# Altium PCB LightLinkV2.PcbDoc (part 1 of 2)
Units mil, origin at the board's own origin, x right, y up, seen from the top; angles counter-clockwise.
Board outline 15795 x 10265 mil, 4 copper layers (Top Layer, VCC, GND, Bottom Layer), stack 23.756 mil thick; 269 components, 206 nets, 809 pads, 14 vias.
Unrouted connection lines stored in the file: 511.
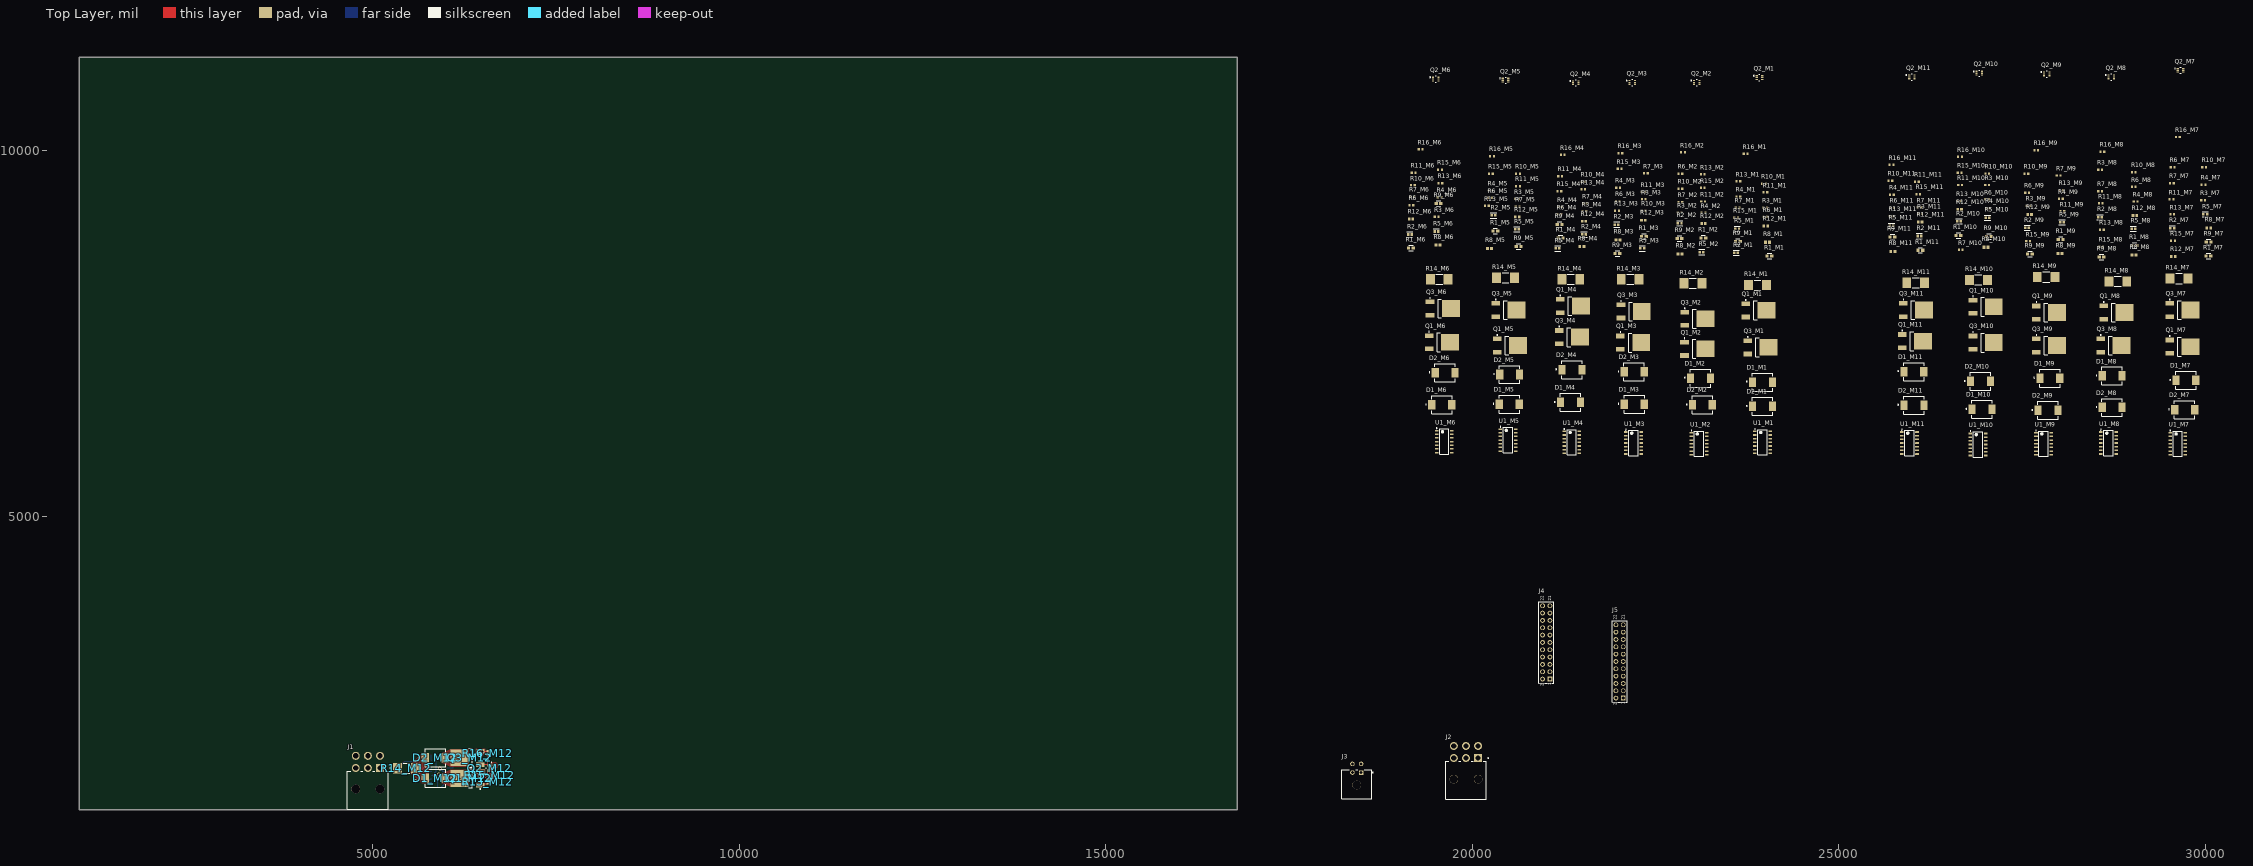
[diagram p0: Top Layer view]
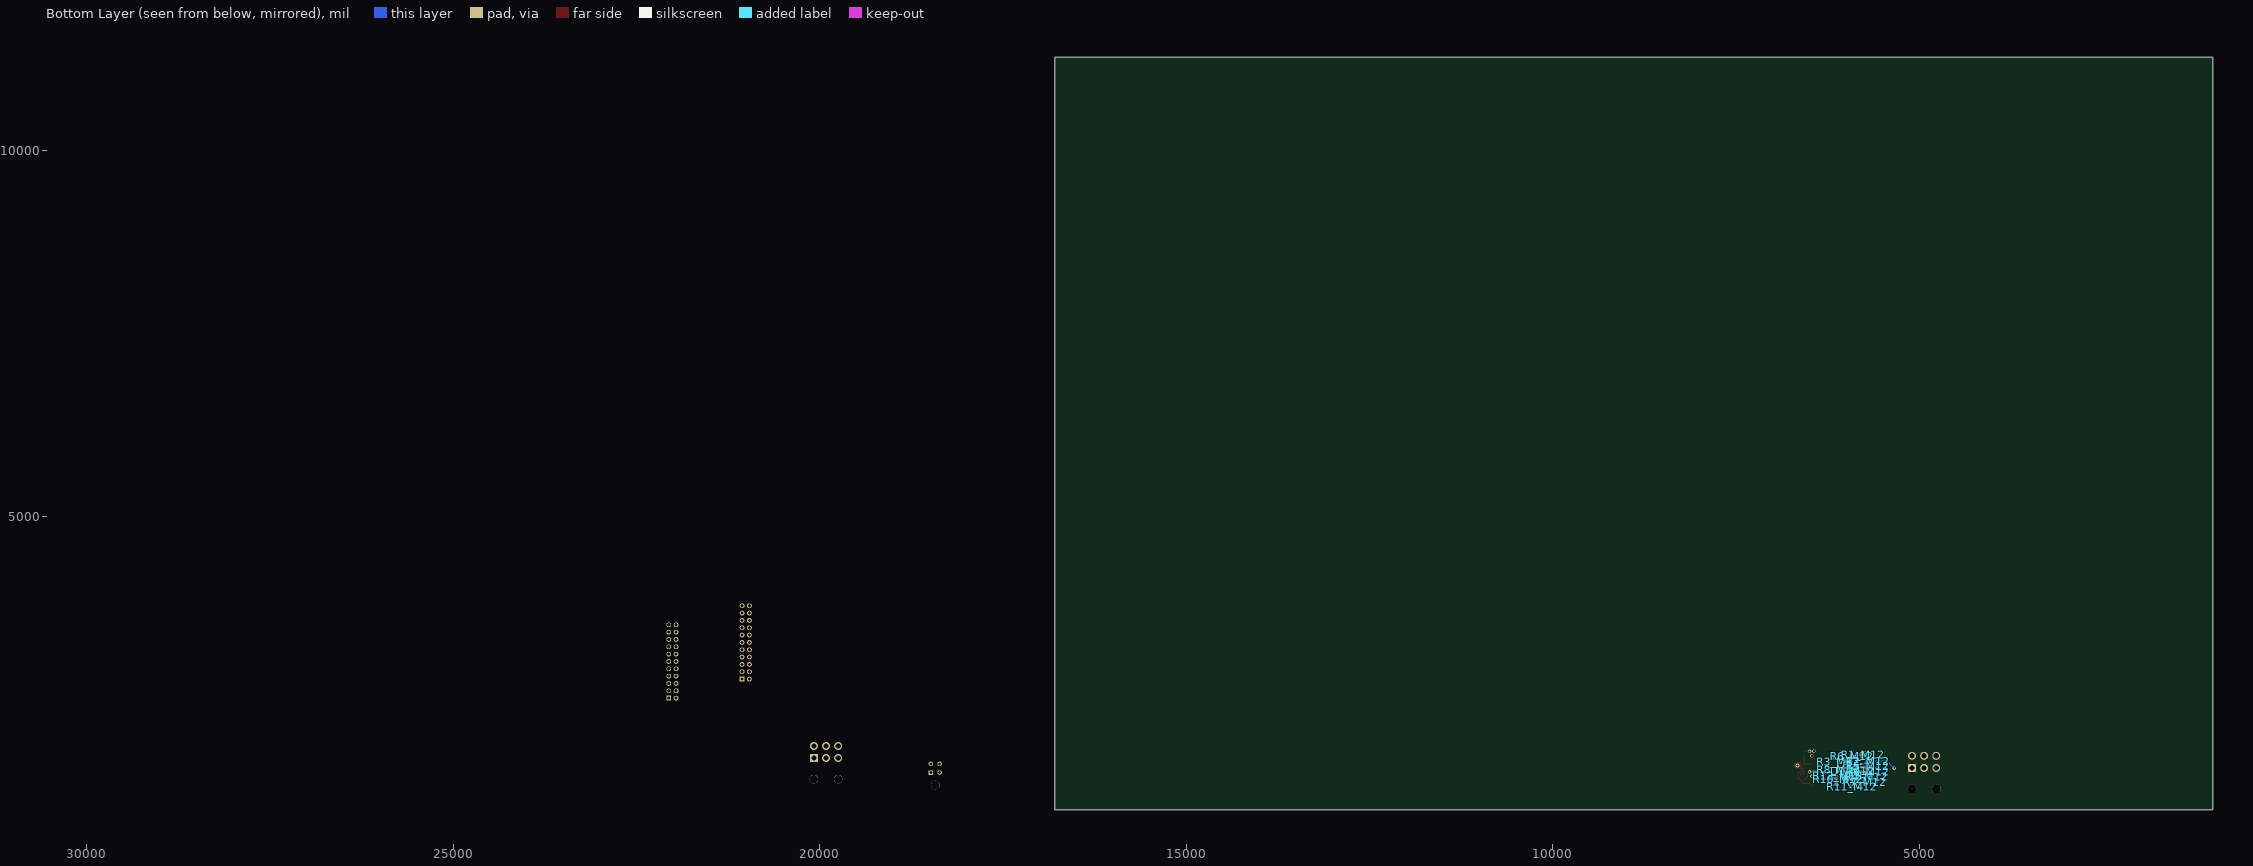
[diagram p1: Bottom Layer view, seen from below]
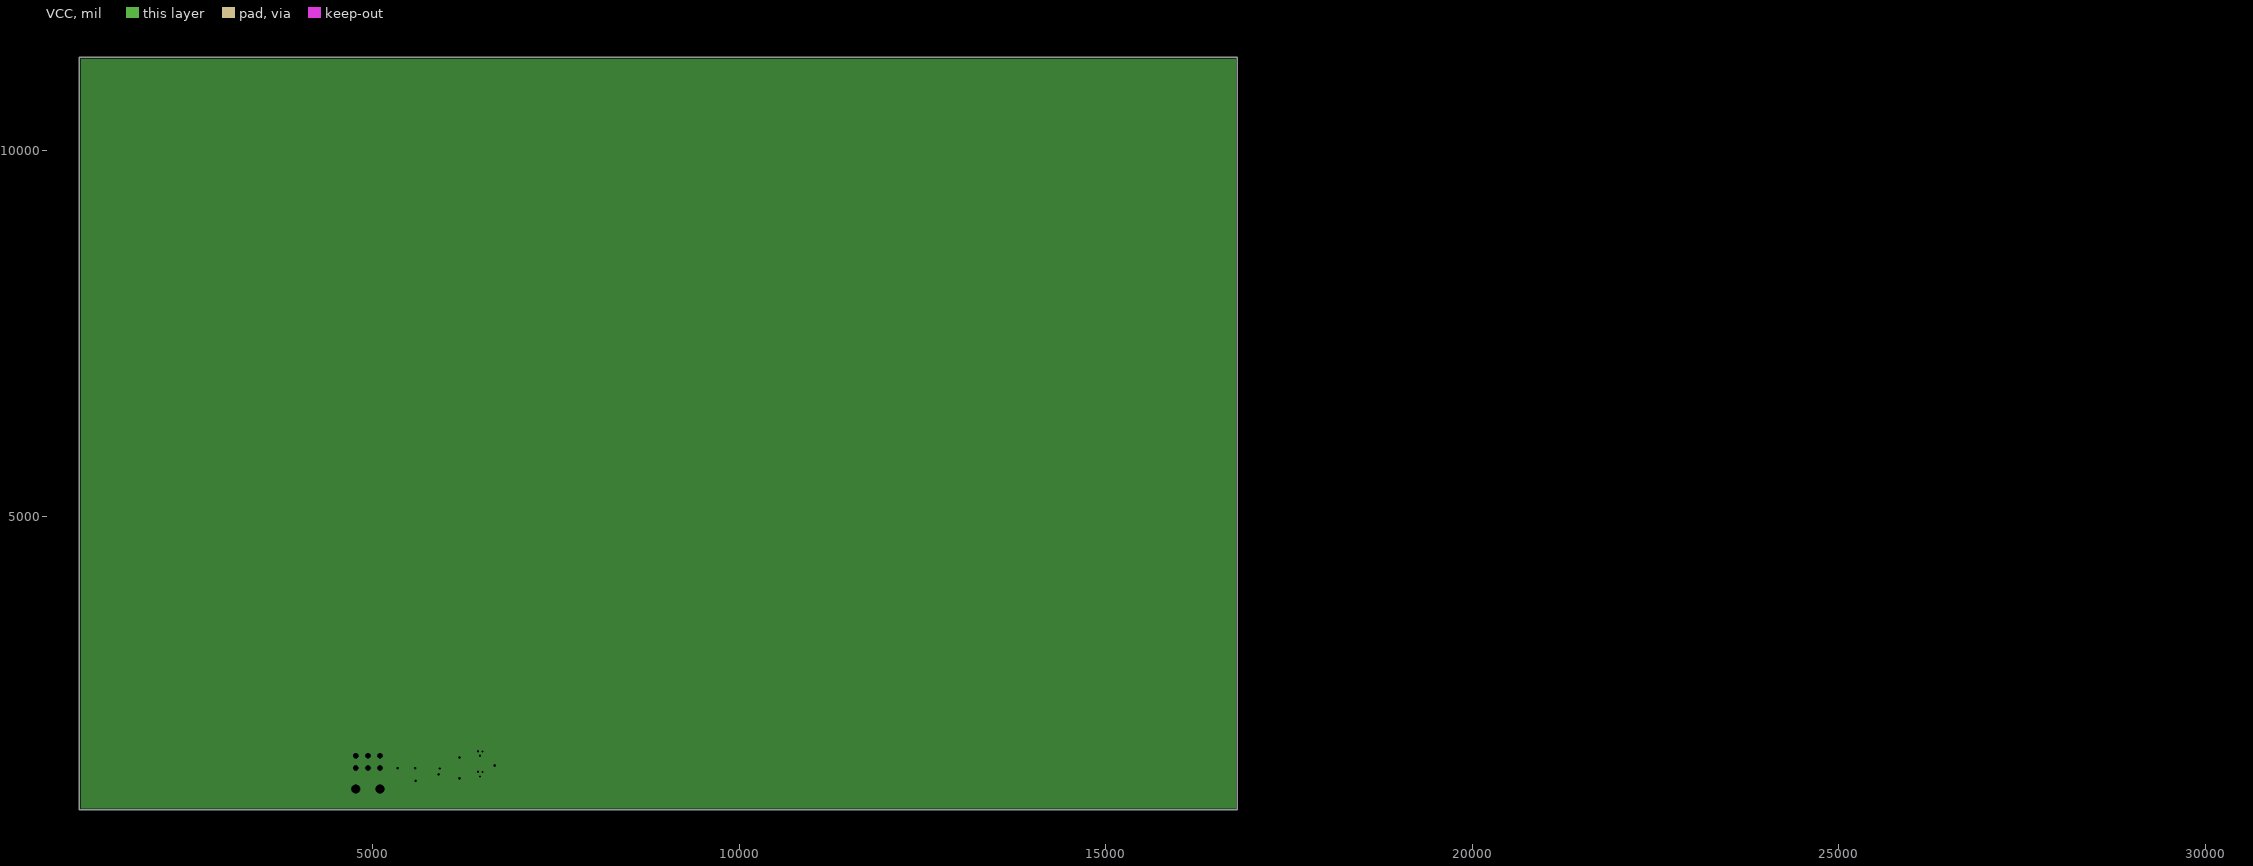
[diagram p2: VCC, clearances drawn from the general rule]
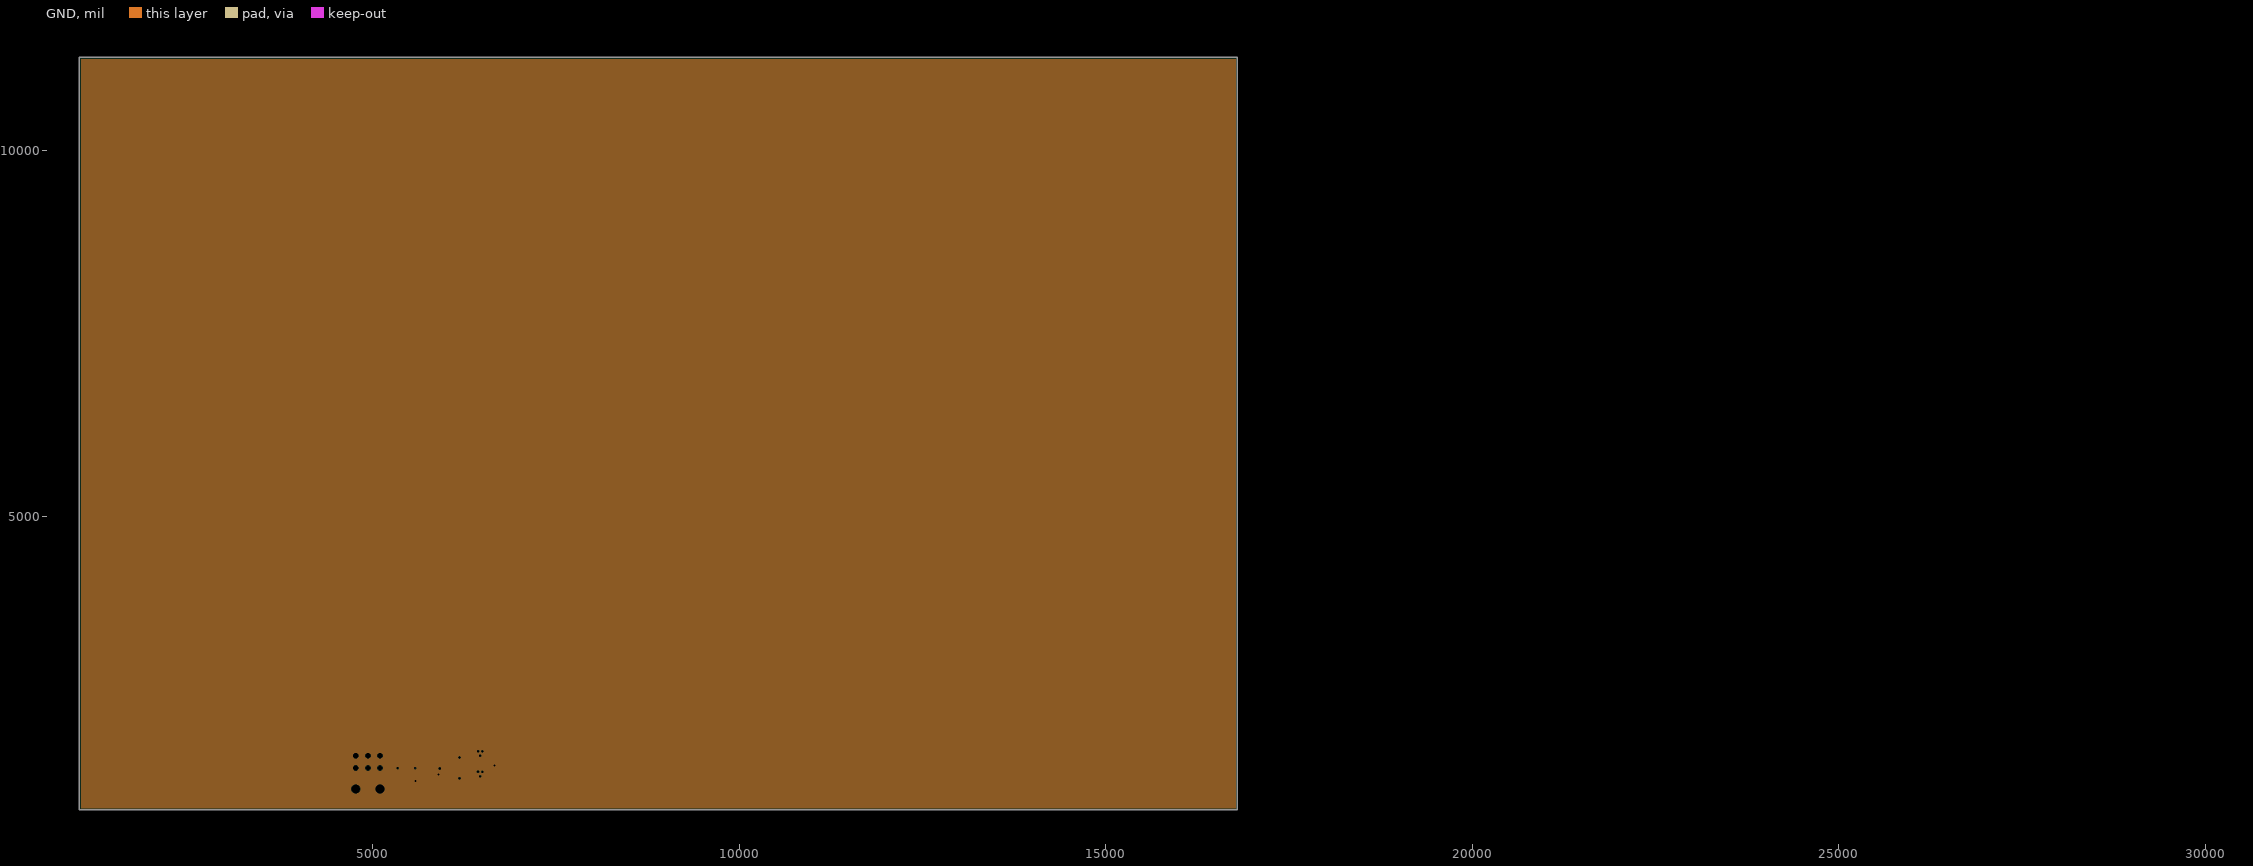
[diagram p3: GND, clearances drawn from the general rule]

## Layer stack, top to bottom
Top Solder: solder mask 0.4, Solder Resist, Dk 3.5
Top Layer: signal copper 1.4
Dielectric 2: prepreg 2.8, PP-006, Dk 4.1
VCC: plane copper 1.378, net VCC
Dielectric 1: dielectric 12.6, FR-4, Dk 4.8
GND: plane copper 1.378, net GND
Dielectric 3: prepreg 2.8, PP-006, Dk 4.1
Bottom Layer: signal copper 1.4
Bottom Solder: solder mask 0.4, Solder Resist, Dk 3.5

## Board outline
1000,1000 16795,1000 16795,11265 1000,11265

## Design rules (kind name [scope] priority, off if disabled: settings)
BoardOutlineClearance [All] p1: gap=7.87 ignorepadtopadclearanceinfootprint=FALSE
Clearance [All] p1: gap=4 ignorepadtopadclearanceinfootprint=FALSE except(5: Arc-Via Track-Via SMDPad-Via THPad-Via Via-Via Via-Fill Via-Poly Via-Region Via-Text; 9.84: Arc-Hole Track-Hole SMDPad-Hole THPad-Hole Via-Hole Fill-Hole Poly-Hole Region-Hole Text-Hole)
ComponentClearance [All] p1: gap=4 collisioncheckmode=3 verticalgap=4 showdistances=TRUE
DiffPairsRouting [All] p1: maxlimit=4 minlimit=4 mostfreqgap=4 toplayer_minwidth=4 toplayer_maxwidth=71497.94 toplayer_prefwidth=4 bottomlayer_minwidth=4 bottomlayer_maxwidth=71497.94 bottomlayer_prefwidth=4 maxuncoupledlength=500
Height [All] p1: minheight=0 maxheight=71497.94 prefheight=500
HoleSize [All] p1: absolutevalues=TRUE maxlimit=248.03 minlimit=7.87 maxpercent=80.000 minpercent=20.000
HoleToHoleClearance [All] p1: gap=9.84 allowstackedmicrovias=FALSE
MinimumAnnularRing [All] p1: minimumring=3
MinimumSolderMaskSliver [All] p1: minsoldermaskwidth=0
PlaneClearance [All] p1: clearance=4
PlaneConnect PlaneConnectPowerPads [InPadClass('PowerPads')] p1: planeconnectstyle=Direct reliefexpansion=20 reliefentries=4 reliefconductorwidth=10 reliefairgap=10
PlaneConnect [All] p2: pad.planeconnectstyle=Relief pad.reliefexpansion=11.81 pad.reliefentries=4 pad.reliefconductorwidth=4 pad.reliefairgap=4 via.planeconnectstyle=Direct via.reliefexpansion=11.81 via.reliefentries=4 via.reliefconductorwidth=5 via.reliefairgap=5
PolygonConnect PolygonConnectPowerPads [All vs (InPadClass('PowerPads'))] p1: connectstyle=Direct reliefconductorwidth=10 reliefentries=4 polygonreliefangle="90 Angle" airgapwidth=10
PolygonConnect [All] p2: thpad.connectstyle=Relief thpad.reliefconductorwidth=4 thpad.reliefentries=4 thpad.polygonreliefangle="90 Angle" thpad.airgapwidth=4 smdpad.connectstyle=Direct smdpad.reliefconductorwidth=4 smdpad.reliefentries=4 smdpad.polygonreliefangle="90 Angle" smdpad.airgapwidth=4 via.connectstyle=Direct via.reliefconductorwidth=5 via.reliefentries=4 via.polygonreliefangle="90 Angle" via.airgapwidth=5
RoutingVias [All] p1: holewidth=7.87 width=17.72 viastyle="Through Hole" minholewidth=7.87 minwidth=17.72 maxholewidth=248.03 maxwidth=257.87
SilkToSilkClearance [All] p1: silktosilkclearance=0
SilkToSolderMaskClearance [IsPad] p1: minsilkscreentomaskgap=4 clearancetoexposedcopper=TRUE
SolderMaskExpansion [All] p1: expansion=2.95 istentingtop=FALSE
Width [All] p1: maxlimit=71497.94 minlimit=4 preferedwidth=4
20 further rules are at their usual default settings.

## Classes and differential pairs
channel class MOSFET: M1 M2 M3 M4 M5 M6 M7 M8 M9 M10 M11 M12
component class M12: D1_M12 D2_M12 Q1_M12 Q2_M12 Q3_M12 R1_M12 R2_M12 R3_M12 R4_M12 R5_M12 R6_M12 R7_M12 R8_M12 R9_M12 R10_M12 R11_M12 R12_M12 R13_M12 R14_M12 R15_M12 R16_M12 U1_M12
component class M11: D1_M11 D2_M11 Q1_M11 Q2_M11 Q3_M11 R1_M11 R2_M11 R3_M11 R4_M11 R5_M11 R6_M11 R7_M11 R8_M11 R9_M11 R10_M11 R11_M11 R12_M11 R13_M11 R14_M11 R15_M11 R16_M11 U1_M11
component class M10: D1_M10 D2_M10 Q1_M10 Q2_M10 Q3_M10 R1_M10 R2_M10 R3_M10 R4_M10 R5_M10 R6_M10 R7_M10 R8_M10 R9_M10 R10_M10 R11_M10 R12_M10 R13_M10 R14_M10 R15_M10 R16_M10 U1_M10
component class M9: D1_M9 D2_M9 Q1_M9 Q2_M9 Q3_M9 R1_M9 R2_M9 R3_M9 R4_M9 R5_M9 R6_M9 R7_M9 R8_M9 R9_M9 R10_M9 R11_M9 R12_M9 R13_M9 R14_M9 R15_M9 R16_M9 U1_M9
component class M8: D1_M8 D2_M8 Q1_M8 Q2_M8 Q3_M8 R1_M8 R2_M8 R3_M8 R4_M8 R5_M8 R6_M8 R7_M8 R8_M8 R9_M8 R10_M8 R11_M8 R12_M8 R13_M8 R14_M8 R15_M8 R16_M8 U1_M8
component class M7: D1_M7 D2_M7 Q1_M7 Q2_M7 Q3_M7 R1_M7 R2_M7 R3_M7 R4_M7 R5_M7 R6_M7 R7_M7 R8_M7 R9_M7 R10_M7 R11_M7 R12_M7 R13_M7 R14_M7 R15_M7 R16_M7 U1_M7
component class M6: D1_M6 D2_M6 Q1_M6 Q2_M6 Q3_M6 R1_M6 R2_M6 R3_M6 R4_M6 R5_M6 R6_M6 R7_M6 R8_M6 R9_M6 R10_M6 R11_M6 R12_M6 R13_M6 R14_M6 R15_M6 R16_M6 U1_M6
component class M5: D1_M5 D2_M5 Q1_M5 Q2_M5 Q3_M5 R1_M5 R2_M5 R3_M5 R4_M5 R5_M5 R6_M5 R7_M5 R8_M5 R9_M5 R10_M5 R11_M5 R12_M5 R13_M5 R14_M5 R15_M5 R16_M5 U1_M5
component class M4: D1_M4 D2_M4 Q1_M4 Q2_M4 Q3_M4 R1_M4 R2_M4 R3_M4 R4_M4 R5_M4 R6_M4 R7_M4 R8_M4 R9_M4 R10_M4 R11_M4 R12_M4 R13_M4 R14_M4 R15_M4 R16_M4 U1_M4
component class M3: D1_M3 D2_M3 Q1_M3 Q2_M3 Q3_M3 R1_M3 R2_M3 R3_M3 R4_M3 R5_M3 R6_M3 R7_M3 R8_M3 R9_M3 R10_M3 R11_M3 R12_M3 R13_M3 R14_M3 R15_M3 R16_M3 U1_M3
component class M2: D1_M2 D2_M2 Q1_M2 Q2_M2 Q3_M2 R1_M2 R2_M2 R3_M2 R4_M2 R5_M2 R6_M2 R7_M2 R8_M2 R9_M2 R10_M2 R11_M2 R12_M2 R13_M2 R14_M2 R15_M2 R16_M2 U1_M2
component class M1: D1_M1 D2_M1 Q1_M1 Q2_M1 Q3_M1 R1_M1 R2_M1 R3_M1 R4_M1 R5_M1 R6_M1 R7_M1 R8_M1 R9_M1 R10_M1 R11_M1 R12_M1 R13_M1 R14_M1 R15_M1 R16_M1 U1_M1
component class LightLinkV2: J1 J2 J3 J4 J5

## Components (designator, comment, footprint, x,y, rotation, side; value= is the part's Value field where it differs from the comment)
D1_M1 "S5BC-13-F" FP-SMC-MFG 23960,6835 r0 top value=40pF (schematic designator D1)
D1_M2 "S5BC-13-F" FP-SMC-MFG 23115,6890 r0 top value=40pF (schematic designator D1)
D1_M3 "S5BC-13-F" FP-SMC-MFG 22210.83,6535 r0 top value=40pF (schematic designator D1)
D1_M4 "S5BC-13-F" FP-SMC-MFG 21340,6560 r0 top value=40pF (schematic designator D1)
D1_M5 "S5BC-13-F" FP-SMC-MFG 20505.83,6535 r0 top value=40pF (schematic designator D1)
D1_M6 "S5BC-13-F" FP-SMC-MFG 19585,6525 r0 top value=40pF (schematic designator D1)
D1_M7 "S5BC-13-F" FP-SMC-MFG 29735.83,6860 r0 top value=40pF (schematic designator D1)
D1_M8 "S5BC-13-F" FP-SMC-MFG 28730,6920 r0 top value=40pF (schematic designator D1)
D1_M9 "S5BC-13-F" FP-SMC-MFG 27880,6890 r0 top value=40pF (schematic designator D1)
D1_M10 "S5BC-13-F" FP-SMC-MFG 26955,6465 r0 top value=40pF (schematic designator D1)
D1_M11 "S5BC-13-F" FP-SMC-MFG 26025,6980 r0 top value=40pF (schematic designator D1)
D1_M12 "S5BC-13-F" FP-SMC-MFG 5854.17,1430 r0 top value=40pF (schematic designator D1)
D2_M1 "S5BC-13-F" FP-SMC-MFG 23960.83,6505 r0 top value=40pF (schematic designator D2)
D2_M2 "S5BC-13-F" FP-SMC-MFG 23140,6525 r0 top value=40pF (schematic designator D2)
D2_M3 "S5BC-13-F" FP-SMC-MFG 22210,6975 r0 top value=40pF (schematic designator D2)
D2_M4 "S5BC-13-F" FP-SMC-MFG 21360,7005 r0 top value=40pF (schematic designator D2)
D2_M5 "S5BC-13-F" FP-SMC-MFG 20510,6940 r0 top value=40pF (schematic designator D2)
D2_M6 "S5BC-13-F" FP-SMC-MFG 19630.83,6965 r0 top value=40pF (schematic designator D2)
D2_M7 "S5BC-13-F" FP-SMC-MFG 29720,6460 r0 top value=40pF (schematic designator D2)
D2_M8 "S5BC-13-F" FP-SMC-MFG 28730,6490 r0 top value=40pF (schematic designator D2)
D2_M9 "S5BC-13-F" FP-SMC-MFG 27855,6450 r0 top value=40pF (schematic designator D2)
D2_M10 "S5BC-13-F" FP-SMC-MFG 26935,6845 r0 top value=40pF (schematic designator D2)
D2_M11 "S5BC-13-F" FP-SMC-MFG 26025.83,6520 r0 top value=40pF (schematic designator D2)
D2_M12 "S5BC-13-F" FP-SMC-MFG 5854.17,1710 r0 top value=40pF (schematic designator D2)
J1 "455580003" FP-455580003-MFG 4934.65,1277.13 r180 top
J2 "455580003" FP-455580003-MFG 19914.65,1412.13 r180 top
J3 "43045-0400" FP-43045-0400-MFG 18425,1353.98 r0 top
J4 "61302221121" 61302221121 21010,3285 r90 top
J5 "61302221121" 61302221121 22010,3025 r90 top
Q1_M1 "NTD25P03LT4G" ONSC-DPAK-3-369C-01_V 23905,7815 r0 top (schematic designator Q1)
Q1_M2 "NTD25P03LT4G" ONSC-DPAK-3-369C-01_V 23070,7290 r0 top (schematic designator Q1)
Q1_M3 "NTD25P03LT4G" ONSC-DPAK-3-369C-01_V 22195,7375 r0 top (schematic designator Q1)
Q1_M4 "NTD25P03LT4G" ONSC-DPAK-3-369C-01_V 21375,7875 r0 top (schematic designator Q1)
Q1_M5 "NTD25P03LT4G" ONSC-DPAK-3-369C-01_V 20515,7335 r0 top (schematic designator Q1)
Q1_M6 "NTD25P03LT4G" ONSC-DPAK-3-369C-01_V 19584.76,7380 r0 top (schematic designator Q1)
Q1_M7 "NTD25P03LT4G" ONSC-DPAK-3-369C-01_V 29690,7320 r0 top (schematic designator Q1)
Q1_M8 "NTD25P03LT4G" ONSC-DPAK-3-369C-01_V 28788.23,7785.16 r0 top (schematic designator Q1)
Q1_M9 "NTD25P03LT4G" ONSC-DPAK-3-369C-01_V 27870,7785 r0 top (schematic designator Q1)
Q1_M10 "NTD25P03LT4G" ONSC-DPAK-3-369C-01_V 27005,7865 r0 top (schematic designator Q1)
Q1_M11 "NTD25P03LT4G" ONSC-DPAK-3-369C-01_V 26040,7395 r0 top (schematic designator Q1)
Q1_M12 "NTD25P03LT4G" ONSC-DPAK-3-369C-01_V 6295,1430 r180 top (schematic designator Q1)
Q2_M1 "SSM6N7002KFU,LF" FP-SSOP6-P-0_65A-MFG 23917.6,10990 r0 top (schematic designator Q2)
Q2_M2 "SSM6N7002KFU,LF" FP-SSOP6-P-0_65A-MFG 23062.4,10924.41 r0 top (schematic designator Q2)
Q2_M3 "SSM6N7002KFU,LF" FP-SSOP6-P-0_65A-MFG 22182.4,10924.41 r0 top (schematic designator Q2)
Q2_M4 "SSM6N7002KFU,LF" FP-SSOP6-P-0_65A-MFG 21412.4,10919.41 r0 top (schematic designator Q2)
Q2_M5 "SSM6N7002KFU,LF" FP-SSOP6-P-0_65A-MFG 20455,10955 r0 top (schematic designator Q2)
Q2_M6 "SSM6N7002KFU,LF" FP-SSOP6-P-0_65A-MFG 19502.4,10969.41 r0 top (schematic designator Q2)
Q2_M7 "SSM6N7002KFU,LF" FP-SSOP6-P-0_65A-MFG 29662.4,11090.59 r0 top (schematic designator Q2)
Q2_M8 "SSM6N7002KFU,LF" FP-SSOP6-P-0_65A-MFG 28717.6,10999.41 r0 top (schematic designator Q2)
Q2_M9 "SSM6N7002KFU,LF" FP-SSOP6-P-0_65A-MFG 27837.6,11040.59 r0 top (schematic designator Q2)
Q2_M10 "SSM6N7002KFU,LF" FP-SSOP6-P-0_65A-MFG 26917.6,11050.59 r0 top (schematic designator Q2)
Q2_M11 "SSM6N7002KFU,LF" FP-SSOP6-P-0_65A-MFG 25997.4,10999.41 r0 top (schematic designator Q2)
Q2_M12 "SSM6N7002KFU,LF" FP-SSOP6-P-0_65A-MFG 6595,1570 r270 top (schematic designator Q2)
Q3_M1 "NTD25P03LT4G" ONSC-DPAK-3-369C-01_V 23933.23,7310.16 r0 top (schematic designator Q3)
Q3_M2 "NTD25P03LT4G" ONSC-DPAK-3-369C-01_V 23073.23,7700.16 r0 top (schematic designator Q3)
Q3_M3 "NTD25P03LT4G" ONSC-DPAK-3-369C-01_V 22203.23,7800.16 r0 top (schematic designator Q3)
Q3_M4 "NTD25P03LT4G" ONSC-DPAK-3-369C-01_V 21360,7450 r0 top (schematic designator Q3)
Q3_M5 "NTD25P03LT4G" ONSC-DPAK-3-369C-01_V 20493.23,7820.16 r0 top (schematic designator Q3)
Q3_M6 "NTD25P03LT4G" ONSC-DPAK-3-369C-01_V 19598.23,7840.16 r0 top (schematic designator Q3)
Q3_M7 "NTD25P03LT4G" ONSC-DPAK-3-369C-01_V 29688.23,7820.16 r0 top (schematic designator Q3)
Q3_M8 "NTD25P03LT4G" ONSC-DPAK-3-369C-01_V 28748.23,7335.16 r0 top (schematic designator Q3)
Q3_M9 "NTD25P03LT4G" ONSC-DPAK-3-369C-01_V 27870,7335 r0 top (schematic designator Q3)
Q3_M10 "NTD25P03LT4G" ONSC-DPAK-3-369C-01_V 27005,7375 r0 top (schematic designator Q3)
Q3_M11 "NTD25P03LT4G" ONSC-DPAK-3-369C-01_V 26055,7820 r0 top (schematic designator Q3)
Q3_M12 "NTD25P03LT4G" ONSC-DPAK-3-369C-01_V 6295,1710 r180 top (schematic designator Q3)
R1_M1 "CRCW060343K0FKEA" FP-CRCW0603-e3-IPC_A 24055,8555 r0 top (schematic designator R1)
R1_M2 "CRCW060343K0FKEA" FP-CRCW0603-e3-IPC_A 23152.9,8800 r0 top (schematic designator R1)
R1_M3 "CRCW060343K0FKEA" FP-CRCW0603-e3-IPC_A 22342.9,8825 r0 top (schematic designator R1)
R1_M4 "CRCW060343K0FKEA" FP-CRCW0603-e3-IPC_A 21205,8800 r0 top (schematic designator R1)
R1_M5 "CRCW060343K0FKEA" FP-CRCW0603-e3-IPC_A 20315,8900 r0 top (schematic designator R1)
R1_M6 "CRCW060343K0FKEA" FP-CRCW0603-e3-IPC_A 19162.9,8665 r0 top (schematic designator R1)
R1_M7 "CRCW060343K0FKEA" FP-CRCW0603-e3-IPC_A 30042.9,8555 r0 top (schematic designator R1)
R1_M8 "CRCW060343K0FKEA" FP-CRCW0603-e3-IPC_A 29032.9,8700 r0 top (schematic designator R1)
R1_M9 "CRCW060343K0FKEA" FP-CRCW0603-e3-IPC_A 28027.9,8780 r0 top (schematic designator R1)
R1_M10 "CRCW060343K0FKEA" FP-CRCW0603-e3-IPC_A 26632.9,8835 r0 top (schematic designator R1)
R1_M11 "CRCW060343K0FKEA" FP-CRCW0603-e3-IPC_A 26112.9,8635 r0 top (schematic designator R1)
R1_M12 "CRCW060343K0FKEA" FP-CRCW0603-e3-IPC_A 5765,1755 r0 bottom (schematic designator R1)
R2_M1 "ERA-3AEB102V" FP-ERA3A-IPC_C 23600.37,8600 r0 top (schematic designator R2)
R2_M2 "ERA-3AEB102V" FP-ERA3A-IPC_C 22830.37,9005 r0 top (schematic designator R2)
R2_M3 "ERA-3AEB102V" FP-ERA3A-IPC_C 21970.37,8985 r0 top (schematic designator R2)
R2_M4 "ERA-3AEB102V" FP-ERA3A-IPC_C 21525,8850 r0 top (schematic designator R2)
R2_M5 "ERA-3AEB102V" FP-ERA3A-IPC_C 20290.37,9110 r0 top (schematic designator R2)
R2_M6 "ERA-3AEB102V" FP-ERA3A-IPC_C 19150.37,8850 r0 top (schematic designator R2)
R2_M7 "ERA-3AEB102V" FP-ERA3A-IPC_C 29550.37,8935 r0 top (schematic designator R2)
R2_M8 "ERA-3AEB102V" FP-ERA3A-IPC_C 28564.63,9085 r0 top (schematic designator R2)
R2_M9 "ERA-3AEB102V" FP-ERA3A-IPC_C 27570,8940 r0 top (schematic designator R2)
R2_M10 "ERA-3AEB102V" FP-ERA3A-IPC_C 26640.37,9030 r0 top (schematic designator R2)
R2_M11 "ERA-3AEB102V" FP-ERA3A-IPC_C 26100.37,8830 r0 top (schematic designator R2)
R2_M12 "ERA-3AEB102V" FP-ERA3A-IPC_C 5695,1665 r0 bottom (schematic designator R2)
R3_M1 "ERJ3EKF1002V" RESC1609X55X30LL15T15 23995,9215 r0 top (schematic designator R3)
R3_M2 "ERJ3EKF1002V" RESC1609X55X30LL15T15 22830,9150 r0 top (schematic designator R3)
R3_M3 "ERJ3EKF1002V" RESC1609X55X30LL15T15 22340,9330 r0 top (schematic designator R3)
R3_M4 "ERJ3EKF1002V" RESC1609X55X30LL15T15 21530,9165 r0 top (schematic designator R3)
R3_M5 "ERJ3EKF1002V" RESC1609X55X30LL15T15 20610,9335 r0 top (schematic designator R3)
R3_M6 "ERJ3EKF1002V" RESC1609X55X30LL15T15 19515,9090 r0 top (schematic designator R3)
R3_M7 "ERJ3EKF1002V" RESC1609X55X30LL15T15 29970,9320 r0 top (schematic designator R3)
R3_M8 "ERJ3EKF1002V" RESC1609X55X30LL15T15 28565.59,9735 r0 top (schematic designator R3)
R3_M9 "ERJ3EKF1002V" RESC1609X55X30LL15T15 27590,9245 r0 top (schematic designator R3)
R3_M10 "ERJ3EKF1002V" RESC1609X55X30LL15T15 27025,9525 r0 top (schematic designator R3)
R3_M11 "ERJ3EKF1002V" RESC1609X55X30LL15T15 26110,9135 r0 top (schematic designator R3)
R3_M12 "ERJ3EKF1002V" RESC1609X55X30LL15T15 6100,1660 r90 bottom (schematic designator R3)
R4_M1 "ERJ3EKF1002V" RESC1609X55X30LL15T15 23630,9365 r0 top (schematic designator R4)
R4_M2 "ERJ3EKF1002V" RESC1609X55X30LL15T15 23155,9145 r0 top (schematic designator R4)
R4_M3 "ERJ3EKF1002V" RESC1609X55X30LL15T15 21990,9490 r0 top (schematic designator R4)
R4_M4 "ERJ3EKF1002V" RESC1609X55X30LL15T15 21195,9225 r0 top (schematic designator R4)
R4_M5 "ERJ3EKF1002V" RESC1609X55X30LL15T15 20249.41,9450 r0 top (schematic designator R4)
R4_M6 "ERJ3EKF1002V" RESC1609X55X30LL15T15 19555,9360 r0 top (schematic designator R4)
R4_M7 "ERJ3EKF1002V" RESC1609X55X30LL15T15 29975.59,9530 r0 top (schematic designator R4)
R4_M8 "ERJ3EKF1002V" RESC1609X55X30LL15T15 29050,9300 r0 top (schematic designator R4)
R4_M9 "ERJ3EKF1002V" RESC1609X55X30LL15T15 28030,9335 r0 top (schematic designator R4)
R4_M10 "ERJ3EKF1002V" RESC1609X55X30LL15T15 27035,9210 r0 top (schematic designator R4)
R4_M11 "ERJ3EKF1002V" RESC1609X55X30LL15T15 25725.59,9395 r0 top (schematic designator R4)
R4_M12 "ERJ3EKF1002V" RESC1609X55X30LL15T15 5715,1450 r0 bottom (schematic designator R4)
R5_M1 "ERA-3AEB102V" FP-ERA3A-IPC_C 23614.63,8930 r0 top (schematic designator R5)
R5_M2 "ERA-3AEB102V" FP-ERA3A-IPC_C 23130,8610 r0 top (schematic designator R5)
R5_M3 "ERA-3AEB102V" FP-ERA3A-IPC_C 22319.63,8660 r0 top (schematic designator R5)
R5_M4 "ERA-3AEB102V" FP-ERA3A-IPC_C 21165,8660 r0 top (schematic designator R5)
R5_M5 "ERA-3AEB102V" FP-ERA3A-IPC_C 20610.37,8920 r0 top (schematic designator R5)
R5_M6 "ERA-3AEB102V" FP-ERA3A-IPC_C 19510.37,8890 r0 top (schematic designator R5)
R5_M7 "ERA-3AEB102V" FP-ERA3A-IPC_C 30000.37,9125 r0 top (schematic designator R5)
R5_M8 "ERA-3AEB102V" FP-ERA3A-IPC_C 29020.37,8930 r0 top (schematic designator R5)
R5_M9 "ERA-3AEB102V" FP-ERA3A-IPC_C 28045.37,9015 r0 top (schematic designator R5)
R5_M10 "ERA-3AEB102V" FP-ERA3A-IPC_C 27029.63,9080 r0 top (schematic designator R5)
R5_M11 "ERA-3AEB102V" FP-ERA3A-IPC_C 25720.37,8970 r0 top (schematic designator R5)
R5_M12 "ERA-3AEB102V" FP-ERA3A-IPC_C 5695.37,1595 r0 bottom (schematic designator R5)
R6_M1 "ERJ3EKF1002V" RESC1609X55X30LL15T15 24000,9090 r0 top (schematic designator R6)
R6_M2 "ERJ3EKF1002V" RESC1609X55X30LL15T15 22840,9680 r0 top (schematic designator R6)
R6_M3 "ERJ3EKF1002V" RESC1609X55X30LL15T15 21985,9305 r0 top (schematic designator R6)
R6_M4 "ERJ3EKF1002V" RESC1609X55X30LL15T15 21190,9125 r0 top (schematic designator R6)
R6_M5 "ERJ3EKF1002V" RESC1609X55X30LL15T15 20245,9350 r0 top (schematic designator R6)
R6_M6 "ERJ3EKF1002V" RESC1609X55X30LL15T15 19170,9250 r0 top (schematic designator R6)
R6_M7 "ERJ3EKF1002V" RESC1609X55X30LL15T15 29555,9770 r0 top (schematic designator R6)
R6_M8 "ERJ3EKF1002V" RESC1609X55X30LL15T15 29025,9500 r0 top (schematic designator R6)
R6_M9 "ERJ3EKF1002V" RESC1609X55X30LL15T15 27569.41,9420 r0 top (schematic designator R6)
R6_M10 "ERJ3EKF1002V" RESC1609X55X30LL15T15 27020,9330 r0 top (schematic designator R6)
R6_M11 "ERJ3EKF1002V" RESC1609X55X30LL15T15 25730,9215 r0 top (schematic designator R6)
R6_M12 "ERJ3EKF1002V" RESC1609X55X30LL15T15 5915,1735 r0 bottom (schematic designator R6)
R7_M1 "ERJ3EKF1002V" RESC1609X55X30LL15T15 23620,9215 r0 top (schematic designator R7)
R7_M2 "ERJ3EKF1002V" RESC1609X55X30LL15T15 22840,9290 r0 top (schematic designator R7)
R7_M3 "ERJ3EKF1002V" RESC1609X55X30LL15T15 22370,9685 r0 top (schematic designator R7)
R7_M4 "ERJ3EKF1002V" RESC1609X55X30LL15T15 21535,9275 r0 top (schematic designator R7)
R7_M5 "ERJ3EKF1002V" RESC1609X55X30LL15T15 20620,9230 r0 top (schematic designator R7)
R7_M6 "ERJ3EKF1002V" RESC1609X55X30LL15T15 19180,9365 r0 top (schematic designator R7)
R7_M7 "ERJ3EKF1002V" RESC1609X55X30LL15T15 29545,9550 r0 top (schematic designator R7)
R7_M8 "ERJ3EKF1002V" RESC1609X55X30LL15T15 28565,9440 r0 top (schematic designator R7)
R7_M9 "ERJ3EKF1002V" RESC1609X55X30LL15T15 28000.59,9655 r0 top (schematic designator R7)
R7_M10 "ERJ3EKF1002V" RESC1609X55X30LL15T15 26664.41,8640 r0 top (schematic designator R7)
R7_M11 "ERJ3EKF1002V" RESC1609X55X30LL15T15 26100,9220 r0 top (schematic designator R7)
R7_M12 "ERJ3EKF1002V" RESC1609X55X30LL15T15 5740,1380 r90 bottom (schematic designator R7)
R8_M1 "ERA-3AEB751V" RESC1608X55X30ML20T20 24027.44,8745 r0 top (schematic designator R8)
R8_M2 "ERA-3AEB751V" RESC1608X55X30ML20T20 22832.44,8585 r0 top (schematic designator R8)
R8_M3 "ERA-3AEB751V" RESC1608X55X30ML20T20 21990,8775 r0 top (schematic designator R8)
R8_M4 "ERA-3AEB751V" RESC1608X55X30ML20T20 21495,8685 r0 top (schematic designator R8)
R8_M5 "ERA-3AEB751V" RESC1608X55X30ML20T20 20235,8660 r0 top (schematic designator R8)
R8_M6 "ERA-3AEB751V" RESC1608X55X30ML20T20 19532.44,8705 r0 top (schematic designator R8)
R8_M7 "ERA-3AEB751V" RESC1608X55X30ML20T20 30047.44,8940 r0 top (schematic designator R8)
R8_M8 "ERA-3AEB751V" RESC1608X55X30ML20T20 29027.44,8570 r0 top (schematic designator R8)
R8_M9 "ERA-3AEB751V" RESC1608X55X30ML20T20 28020,8590 r0 top (schematic designator R8)
R8_M10 "ERA-3AEB751V" RESC1608X55X30ML20T20 27007.44,8675 r0 top (schematic designator R8)
R8_M11 "ERA-3AEB751V" RESC1608X55X30ML20T20 25737.44,8620 r0 top (schematic designator R8)
R8_M12 "ERA-3AEB751V" RESC1608X55X30ML20T20 6100,1550 r90 bottom (schematic designator R8)
R9_M1 "CRCW060343K0FKEA" FP-CRCW0603-e3-IPC_A 23622.9,8755 r0 top (schematic designator R9)
R9_M2 "CRCW060343K0FKEA" FP-CRCW0603-e3-IPC_A 22827.9,8795 r0 top (schematic designator R9)
R9_M3 "CRCW060343K0FKEA" FP-CRCW0603-e3-IPC_A 21980,8590 r0 top (schematic designator R9)
R9_M4 "CRCW060343K0FKEA" FP-CRCW0603-e3-IPC_A 21192.9,8985 r0 top (schematic designator R9)
R9_M5 "CRCW060343K0FKEA" FP-CRCW0603-e3-IPC_A 20632.9,8685 r0 top (schematic designator R9)
R9_M6 "CRCW060343K0FKEA" FP-CRCW0603-e3-IPC_A 19540,9270 r0 top (schematic designator R9)
R9_M7 "CRCW060343K0FKEA" FP-CRCW0603-e3-IPC_A 30045,8750 r0 top (schematic designator R9)
R9_M8 "CRCW060343K0FKEA" FP-CRCW0603-e3-IPC_A 28585,8540 r0 top (schematic designator R9)
R9_M9 "CRCW060343K0FKEA" FP-CRCW0603-e3-IPC_A 27607.9,8585 r0 top (schematic designator R9)
R9_M10 "CRCW060343K0FKEA" FP-CRCW0603-e3-IPC_A 27047.9,8820 r0 top (schematic designator R9)
R9_M11 "CRCW060343K0FKEA" FP-CRCW0603-e3-IPC_A 25732.9,8815 r0 top (schematic designator R9)
R9_M12 "CRCW060343K0FKEA" FP-CRCW0603-e3-IPC_A 5700,1520 r180 bottom (schematic designator R9)
R10_M1 "ERJ3EKF1002V" RESC1609X55X30LL15T15 23980,9545 r0 top (schematic designator R10)
R10_M2 "ERJ3EKF1002V" RESC1609X55X30LL15T15 22840,9475 r0 top (schematic designator R10)
R10_M3 "ERJ3EKF1002V" RESC1609X55X30LL15T15 22339.41,9175 r0 top (schematic designator R10)
R10_M4 "ERJ3EKF1002V" RESC1609X55X30LL15T15 21514.41,9570 r0 top (schematic designator R10)
R10_M5 "ERJ3EKF1002V" RESC1609X55X30LL15T15 20625,9680 r0 top (schematic designator R10)
R10_M6 "ERJ3EKF1002V" RESC1609X55X30LL15T15 19190,9520 r0 top (schematic designator R10)
R10_M7 "ERJ3EKF1002V" RESC1609X55X30LL15T15 29985.59,9770 r0 top (schematic designator R10)
R10_M8 "ERJ3EKF1002V" RESC1609X55X30LL15T15 29025,9700 r0 top (schematic designator R10)
R10_M9 "ERJ3EKF1002V" RESC1609X55X30LL15T15 27560.59,9680 r0 top (schematic designator R10)
R10_M10 "ERJ3EKF1002V" RESC1609X55X30LL15T15 27025.59,9680 r0 top (schematic designator R10)
R10_M11 "ERJ3EKF1002V" RESC1609X55X30LL15T15 25705,9585 r0 top (schematic designator R10)
R10_M12 "ERJ3EKF1002V" RESC1609X55X30LL15T15 6105.59,1415 r0 bottom (schematic designator R10)
R11_M1 "ERJ3EKF1002V" RESC1609X55X30LL15T15 24000,9425 r0 top (schematic designator R11)
R11_M2 "ERJ3EKF1002V" RESC1609X55X30LL15T15 23150,9300 r0 top (schematic designator R11)
R11_M3 "ERJ3EKF1002V" RESC1609X55X30LL15T15 22335,9430 r0 top (schematic designator R11)
R11_M4 "ERJ3EKF1002V" RESC1609X55X30LL15T15 21200,9645 r0 top (schematic designator R11)
R11_M5 "ERJ3EKF1002V" RESC1609X55X30LL15T15 20625,9510 r0 top (schematic designator R11)
R11_M6 "ERJ3EKF1002V" RESC1609X55X30LL15T15 19200,9695 r0 top (schematic designator R11)
R11_M7 "ERJ3EKF1002V" RESC1609X55X30LL15T15 29540,9330 r0 top (schematic designator R11)
R11_M8 "ERJ3EKF1002V" RESC1609X55X30LL15T15 28575,9275 r0 top (schematic designator R11)
R11_M9 "ERJ3EKF1002V" RESC1609X55X30LL15T15 28050,9165 r0 top (schematic designator R11)
R11_M10 "ERJ3EKF1002V" RESC1609X55X30LL15T15 26655,9525 r0 top (schematic designator R11)
R11_M11 "ERJ3EKF1002V" RESC1609X55X30LL15T15 26065,9570 r0 top (schematic designator R11)
R11_M12 "ERJ3EKF1002V" RESC1609X55X30LL15T15 5915,1315 r0 bottom (schematic designator R11)
R12_M1 "ERA3AEB242V" RESC1608X55X30NL20T20 24005,8965 r0 top (schematic designator R12)
R12_M2 "ERA3AEB242V" RESC1608X55X30NL20T20 23155,9000 r0 top (schematic designator R12)
R12_M3 "ERA3AEB242V" RESC1608X55X30NL20T20 22335,9045 r0 top (schematic designator R12)
R12_M4 "ERA3AEB242V" RESC1608X55X30NL20T20 21525,9030 r0 top (schematic designator R12)
R12_M5 "ERA3AEB242V" RESC1608X55X30NL20T20 20614.41,9090 r0 top (schematic designator R12)
R12_M6 "ERA3AEB242V" RESC1608X55X30NL20T20 19165,9060 r0 top (schematic designator R12)
R12_M7 "ERA3AEB242V" RESC1608X55X30NL20T20 29564.41,8550 r0 top (schematic designator R12)
R12_M8 "ERA3AEB242V" RESC1608X55X30NL20T20 29039.41,9110 r0 top (schematic designator R12)
R12_M9 "ERA3AEB242V" RESC1608X55X30NL20T20 27604.41,9125 r0 top (schematic designator R12)
R12_M10 "ERA3AEB242V" RESC1608X55X30NL20T20 26649.41,9190 r0 top (schematic designator R12)
R12_M11 "ERA3AEB242V" RESC1608X55X30NL20T20 26110,9020 r0 top (schematic designator R12)
R12_M12 "ERA3AEB242V" RESC1608X55X30NL20T20 6105,1465 r180 bottom (schematic designator R12)
R13_M1 "ERJ3EKF1002V" RESC1609X55X30LL15T15 23630,9575 r0 top (schematic designator R13)
R13_M2 "ERJ3EKF1002V" RESC1609X55X30LL15T15 23145,9670 r0 top (schematic designator R13)
R13_M3 "ERJ3EKF1002V" RESC1609X55X30LL15T15 21975,9175 r0 top (schematic designator R13)
R13_M4 "ERJ3EKF1002V" RESC1609X55X30LL15T15 21515,9465 r0 top (schematic designator R13)
R13_M5 "ERJ3EKF1002V" RESC1609X55X30LL15T15 20200,9240 r0 top (schematic designator R13)
R13_M6 "ERJ3EKF1002V" RESC1609X55X30LL15T15 19565,9550 r0 top (schematic designator R13)
R13_M7 "ERJ3EKF1002V" RESC1609X55X30LL15T15 29549.41,9125 r0 top (schematic designator R13)
R13_M8 "ERJ3EKF1002V" RESC1609X55X30LL15T15 28590,8915 r0 top (schematic designator R13)
R13_M9 "ERJ3EKF1002V" RESC1609X55X30LL15T15 28035.59,9455 r0 top (schematic designator R13)
R13_M10 "ERJ3EKF1002V" RESC1609X55X30LL15T15 26640,9305 r0 top (schematic designator R13)
R13_M11 "ERJ3EKF1002V" RESC1609X55X30LL15T15 25720,9100 r0 top (schematic designator R13)
R13_M12 "ERJ3EKF1002V" RESC1609X55X30LL15T15 6570,1385 r90 top (schematic designator R13)
R14_M1 "MCS3264R010FER" FP-MCS3264-MFG 23892.05,8160 r0 top (schematic designator R14)
R14_M2 "MCS3264R010FER" FP-MCS3264-MFG 23010,8185 r0 top (schematic designator R14)
R14_M3 "MCS3264R010FER" FP-MCS3264-MFG 22155,8240 r0 top (schematic designator R14)
R14_M4 "MCS3264R010FER" FP-MCS3264-MFG 21345,8240 r0 top (schematic designator R14)
R14_M5 "MCS3264R010FER" FP-MCS3264-MFG 20455,8260 r0 top (schematic designator R14)
R14_M6 "MCS3264R010FER" FP-MCS3264-MFG 19550,8240 r0 top (schematic designator R14)
R14_M7 "MCS3264R010FER" FP-MCS3264-MFG 29642.95,8250 r0 top (schematic designator R14)
R14_M8 "MCS3264R010FER" FP-MCS3264-MFG 28807.05,8210 r0 top (schematic designator R14)
R14_M9 "MCS3264R010FER" FP-MCS3264-MFG 27830,8270 r0 top (schematic designator R14)
R14_M10 "MCS3264R010FER" FP-MCS3264-MFG 26905,8230 r0 top (schematic designator R14)
R14_M11 "MCS3264R010FER" FP-MCS3264-MFG 26050,8190 r0 top (schematic designator R14)
R14_M12 "MCS3264R010FER" FP-MCS3264-MFG 5460,1570 r180 top (schematic designator R14)
R15_M1 "ERJ3EKF1002V" RESC1609X55X30LL15T15 23600,9080 r0 top (schematic designator R15)
R15_M2 "ERJ3EKF1002V" RESC1609X55X30LL15T15 23145,9485 r0 top (schematic designator R15)
R15_M3 "ERJ3EKF1002V" RESC1609X55X30LL15T15 22010,9745 r0 top (schematic designator R15)
R15_M4 "ERJ3EKF1002V" RESC1609X55X30LL15T15 21190,9440 r0 top (schematic designator R15)
R15_M5 "ERJ3EKF1002V" RESC1609X55X30LL15T15 20255,9680 r0 top (schematic designator R15)
R15_M6 "ERJ3EKF1002V" RESC1609X55X30LL15T15 19560,9735 r0 top (schematic designator R15)
R15_M7 "ERJ3EKF1002V" RESC1609X55X30LL15T15 29560,8765 r0 top (schematic designator R15)
R15_M8 "ERJ3EKF1002V" RESC1609X55X30LL15T15 28580,8685 r0 top (schematic designator R15)
R15_M9 "ERJ3EKF1002V" RESC1609X55X30LL15T15 27584.41,8755 r0 top (schematic designator R15)
R15_M10 "ERJ3EKF1002V" RESC1609X55X30LL15T15 26650,9695 r0 top (schematic designator R15)
R15_M11 "ERJ3EKF1002V" RESC1609X55X30LL15T15 26085,9400 r0 top (schematic designator R15)
R15_M12 "ERJ3EKF1002V" RESC1609X55X30LL15T15 6595,1475 r180 top (schematic designator R15)
R16_M1 "ERJ3EKF1002V" RESC1609X55X30LL15T15 23730.59,9950 r0 top (schematic designator R16)
R16_M2 "ERJ3EKF1002V" RESC1609X55X30LL15T15 22875,9970 r0 top (schematic designator R16)
R16_M3 "ERJ3EKF1002V" RESC1609X55X30LL15T15 22020.59,9960 r0 top (schematic designator R16)
R16_M4 "ERJ3EKF1002V" RESC1609X55X30LL15T15 21235,9935 r0 top (schematic designator R16)
R16_M5 "ERJ3EKF1002V" RESC1609X55X30LL15T15 20270,9920 r0 top (schematic designator R16)
R16_M6 "ERJ3EKF1002V" RESC1609X55X30LL15T15 19295.59,10010 r0 top (schematic designator R16)
R16_M7 "ERJ3EKF1002V" RESC1609X55X30LL15T15 29625.59,10180 r0 top (schematic designator R16)
R16_M8 "ERJ3EKF1002V" RESC1609X55X30LL15T15 28595.59,9980 r0 top (schematic designator R16)
R16_M9 "ERJ3EKF1002V" RESC1609X55X30LL15T15 27694.41,10000 r0 top (schematic designator R16)
R16_M10 "ERJ3EKF1002V" RESC1609X55X30LL15T15 26654.41,9910 r0 top (schematic designator R16)
R16_M11 "ERJ3EKF1002V" RESC1609X55X30LL15T15 25719.41,9800 r0 top (schematic designator R16)
R16_M12 "ERJ3EKF1002V" RESC1609X55X30LL15T15 6569,1774 r90 top (schematic designator R16)
U1_M1 "LM324D" D0014A_L 23960,6015 r0 top (schematic designator U1)
U1_M2 "LM324D" D0014A_L 23095,5995 r0 top (schematic designator U1)
U1_M3 "LM324D" D0014A_L 22200,6005 r0 top (schematic designator U1)
U1_M4 "LM324D" D0014A_L 21358.35,6015 r0 top (schematic designator U1)
U1_M5 "LM324D" D0014A_L 20488.35,6045 r0 top (schematic designator U1)
U1_M6 "LM324D" D0014A_L 19618.35,6025 r0 top (schematic designator U1)
U1_M7 "LM324D" D0014A_L 29625,5995 r0 top (schematic designator U1)
U1_M8 "LM324D" D0014A_L 28680,6005 r0 top (schematic designator U1)
U1_M9 "LM324D" D0014A_L 27795,5995 r0 top (schematic designator U1)
U1_M10 "LM324D" D0014A_L 26900,5985 r0 top (schematic designator U1)
U1_M11 "LM324D" D0014A_L 25965,6005 r0 top (schematic designator U1)
U1_M12 "LM324D" D0014A_L 5910,1525 r180 bottom (schematic designator U1)

## Footprints (in the part's own frame and the unit in brackets; to place one, negate y for a bottom-side part, rotate by r counter-clockwise, add the part's x,y. Pads: shape width x height; smd on the part's side, far side on the other; paste and mask are expansions set on the pad)
61302221121 [mm] "Pin Header, pitch 2.54 mm, THT, Vertical, dual row, 22p"
  rect 1.65x1.65 hole 1.1: 1(-12.7,-1.27)
  round 1.65 hole 1.1: 2(-12.7,1.27) 3(-10.16,-1.27) 4(-10.16,1.27) 5(-7.62,-1.27) 6(-7.62,1.27) 7(-5.08,-1.27) 8(-5.08,1.27) 9(-2.54,-1.27) 10(-2.54,1.27) 11(0,-1.27) 12(0,1.27) 13(2.54,-1.27) 14(2.54,1.27) 15(5.08,-1.27) 16(5.08,1.27) 17(7.62,-1.27) 18(7.62,1.27) 19(10.16,-1.27) 20(10.16,1.27) 21(12.7,-1.27) 22(12.7,1.27)
  silkscreen extent -14.12,-2.62 14.12,2.62, body extent -13.97,-2.54 13.97,2.54, height 8.59
D0014A_L [mm] "SOIC, 14-Leads, Body 8.75x4mm, Pitch 1.27mm, IPC High Density"
  rrect18% 1.25x0.55 smd: 1(-2.625,3.81) 2(-2.625,2.54) 3(-2.625,1.27) 4(-2.625,0) 5(-2.625,-1.27) 6(-2.625,-2.54) 7(-2.625,-3.81) 8(2.625,-3.81) 9(2.625,-2.54) 10(2.625,-1.27) 11(2.625,0) 12(2.625,1.27) 13(2.625,2.54) 14(2.625,3.81)
  silkscreen extent -2.75,-4.38 1.6,4.76, body extent -3.02,-4.32 3.02,4.32, height 1.59
FP-43045-0400-MFG [mm]
  rect 1.57x1.57 hole 1.02 paste-1000 mask+0: 1(1.5,3.965)
  round 1.57 hole 1.02 paste-1000 mask+0: 2(-1.5,3.965) 3(1.5,6.965) 4(-1.5,6.965)
  round 3 hole 3 unplated paste-1000 mask+0: ""(0,-0.355)
  silkscreen extent -5.2,-5.21 5.68,4.95, body extent -5.3,-5.31 5.3,7.85, height 0.25
FP-455580003-MFG [mm]
  rect 2.75x2.75 hole 1.8 paste-1000 mask+0: 1(-4.2,-7.5)
  round 2.75 hole 1.8 paste-1000 mask+0: 2(0,-7.5) 3(4.2,-7.5) 4(-4.2,-11.7) 5(0,-11.7) 6(4.2,-11.7)
  round 3 hole 3 unplated paste-1000 mask+0: ""(-4.2,-0.2) ""(4.2,-0.2)
  silkscreen extent -7.82,-7.62 7.09,6.78, body extent -7.19,-13.18 7.19,6.88, height 0.25
FP-CRCW0603-e3-IPC_A [mil]
  rect 44.69x41.82 smd paste+0 mask+0: 1(-32.1,0) 2(32.1,0)
  silkscreen extent -30,-37 30,37, body extent -74,-41 74,41, height 10
FP-ERA3A-IPC_C [mil]
  rect 33.66x35.68 smd paste+0 mask+0: 1(-24.63,0) 2(24.63,0)
  silkscreen extent -41,-35 41,35, body extent -45,-24 45,24, height 10
FP-MCS3264-MFG [mm]
  rect 3.1x3.57 smd paste+0 mask+0: 1(-3.1,0) 2(3.1,0)
  silkscreen extent -1.17,-1.75 1.17,1.75, body extent -4.75,-1.89 4.75,1.89, height 0.25
FP-SMC-MFG [mm]
  rect 2.5x3.3 smd paste+0 mask+0: 1(-3.45,0) 2(3.45,0)
  silkscreen extent -5.57,-3.11 3.55,3.11, body extent -4.8,-3.21 4.8,3.21, height 0.25
FP-SSOP6-P-0_65A-MFG [mm]
  rect 0.8x0.4 smd paste+0 mask+0: 1(-0.95,0.65) 2(-0.95,0) 3(-0.95,-0.65) 4(0.95,-0.65) 5(0.95,0) 6(0.95,0.65)
  silkscreen extent -2.05,-1.1 0.18,1.1, body extent -1.45,-1.2 1.45,1.2, height 0.25
ONSC-DPAK-3-369C-01_V [mm] "DPAK, 3-Leads, Body 6.54x6.095mm, Pitch 2.29mm"
  rect 3x1.6 smd: 1(-4.4,2.29) 3(-4.4,-2.29)
  rect 6.2x5.8 smd: 4(2.8,0)
  silkscreen extent -4.52,-3.27 -0.45,3.76, body extent -1.6,-3.27 4.49,3.27, height 2.38
RESC1608X55X30ML20T20 [mm] "Chip Resistor, 2-Leads, Body 1.60x0.80mm, IPC Low Density"
  rect 1x1.1 smd: 1(-0.7,0) 2(0.7,0)
  body extent -0.9,-0.5 0.9,0.5, height 0.55
RESC1608X55X30NL20T20 [mm] "Chip Resistor, 2-Leads, Body 1.60x0.80mm, IPC Medium Density"
  rect 0.9x1 smd: 1(-0.65,0) 2(0.65,0)
  body extent -0.9,-0.5 0.9,0.5, height 0.55
RESC1609X55X30LL15T15 [mm] "Chip Resistor, 2-Leads, Body 1.75x0.95mm, IPC High Density"
  rect 0.75x0.85 smd: 1(-0.65,0) 2(0.65,0)
  body extent -0.87,-0.48 0.87,0.48, height 0.55